# Altium PCB DEMO.PcbDoc
Units mil, origin at the board's own origin, x right, y up, seen from the top; angles counter-clockwise.
Board outline 945 x 855 mil, 2 copper layers (Top Layer, Bottom Layer); 81 components, 42 nets, 162 pads, 40 vias.
Unrouted connection lines stored in the file: 78.
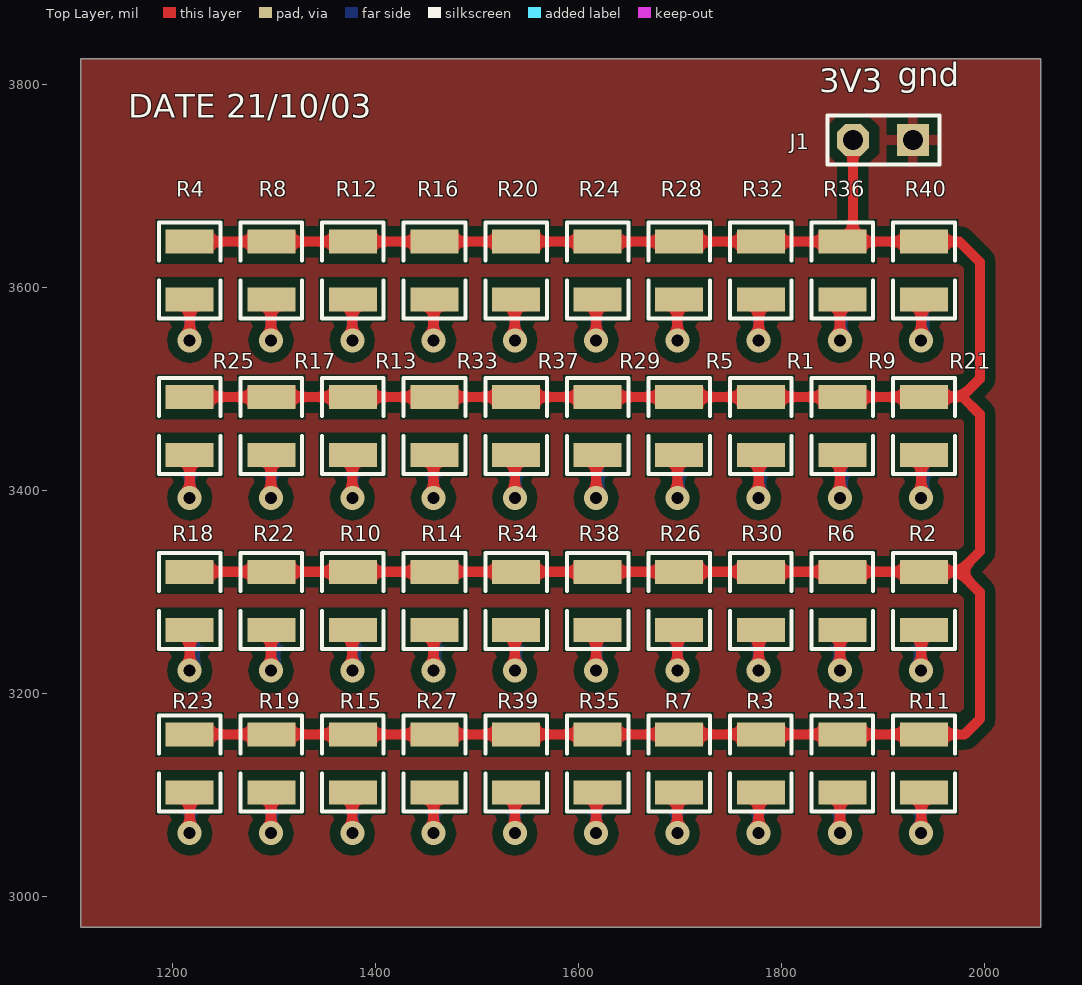
[diagram p0: Top Layer view]
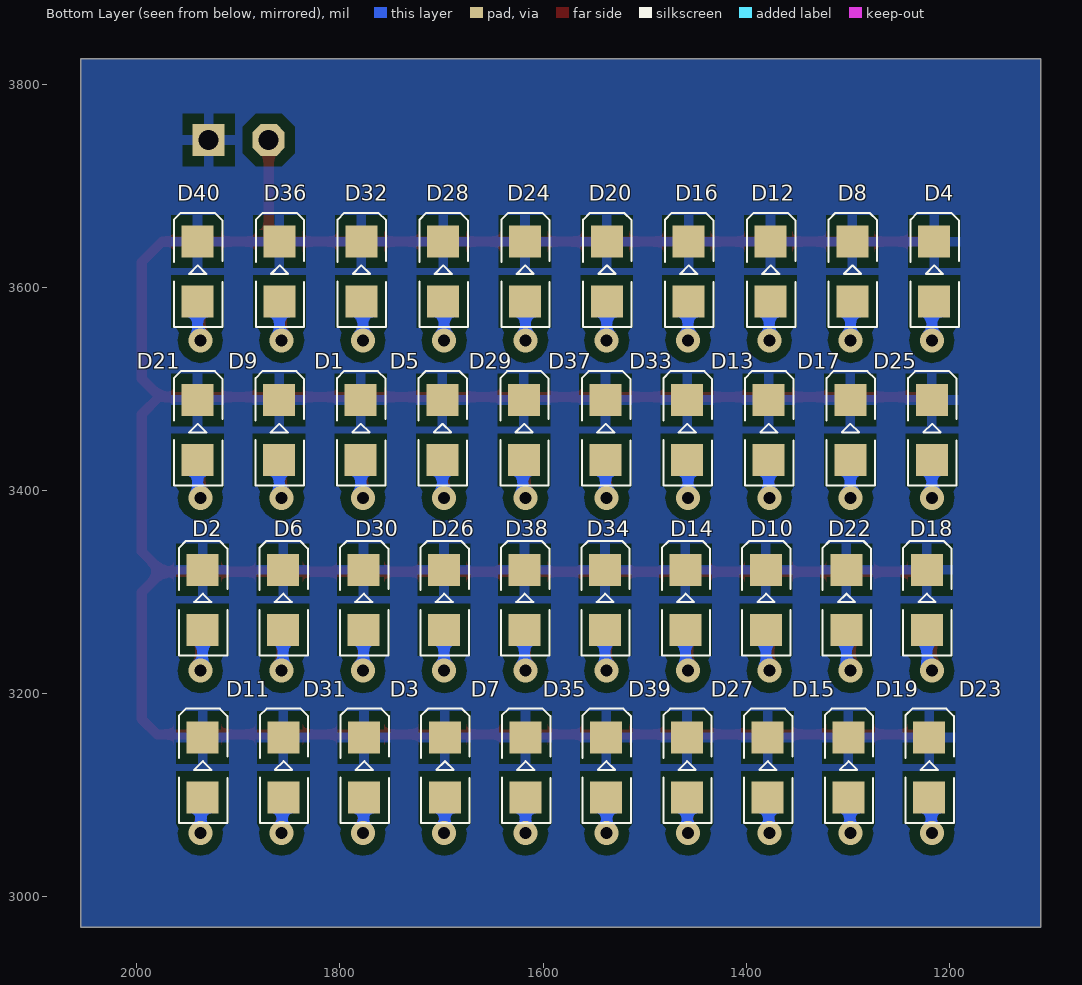
[diagram p1: Bottom Layer view, seen from below]

## Layer stack, top to bottom
Top Solder: solder mask 0.4, Solder Resist, Dk 3.5
Top Layer: signal copper 1.4
Dielectric 1: dielectric 12.6, FR-4, Dk 4.8
Bottom Layer: signal copper 1.4
Bottom Solder: solder mask 0.4, Solder Resist, Dk 3.5

## Board outline
1110,2970 2055,2970 2055,3825 1110,3825

## Design rules (kind name [scope] priority, off if disabled: settings)
Clearance [All] p1: gap=10 ignorepadtopadclearanceinfootprint=FALSE except(0: Arc-Hole Track-Hole SMDPad-Hole THPad-Hole Via-Hole Fill-Hole Poly-Hole Region-Hole Text-Hole)
PolygonConnect [All] p1: connectstyle=Relief reliefconductorwidth=10 reliefentries=4 polygonreliefangle="90 Angle" airgapwidth=10
RoutingVias [All] p1: holewidth=28 width=50 viastyle="Through Hole" minholewidth=28 minwidth=50 maxholewidth=28 maxwidth=50
SolderMaskExpansion [All] p1: expansion=4
Width [All] p1: maxlimit=10 minlimit=10 preferedwidth=10
30 further rules are at their usual default settings.

## Components (designator, comment, footprint, x,y, rotation, side; value= is the part's Value field where it differs from the comment)
D1 "LED_红灯" LED_0603 1779.4,3489.06 r270 bottom
D2 "LED_红灯" LED_0603 1935,3321.97 r270 bottom
D3 "LED_红灯" LED_0603 1776.11,3156.97 r270 bottom
D4 "LED_红灯" LED_0603 1215,3645 r270 bottom
D5 "LED_红灯" LED_0603 1699.09,3489.06 r270 bottom
D6 "LED_红灯" LED_0603 1855.81,3321.97 r270 bottom
D7 "LED_红灯" LED_0603 1696.67,3156.97 r270 bottom
D8 "LED_红灯" LED_0603 1295.56,3645 r270 bottom
D9 "LED_红灯" LED_0603 1859.7,3489.06 r270 bottom
D10 "LED_红灯" LED_0603 1380.66,3321.97 r270 bottom
D11 "LED_红灯" LED_0603 1935,3156.97 r270 bottom
D12 "LED_红灯" LED_0603 1376.11,3645 r270 bottom
D13 "LED_红灯" LED_0603 1377.89,3489.06 r270 bottom
D14 "LED_红灯" LED_0603 1459.86,3321.97 r270 bottom
D15 "LED_红灯" LED_0603 1378.89,3156.97 r270 bottom
D16 "LED_红灯" LED_0603 1456.67,3645 r270 bottom
D17 "LED_红灯" LED_0603 1297.59,3489.06 r270 bottom
D18 "LED_红灯" LED_0603 1222.28,3321.97 r270 bottom
D19 "LED_红灯" LED_0603 1299.44,3156.97 r270 bottom
D20 "LED_红灯" LED_0603 1537.22,3645 r270 bottom
D21 "LED_红灯" LED_0603 1940,3489.06 r270 bottom
D22 "LED_红灯" LED_0603 1301.47,3321.97 r270 bottom
D23 "LED_红灯" LED_0603 1220,3156.97 r270 bottom
D24 "LED_红灯" LED_0603 1617.78,3645 r270 bottom
D25 "LED_红灯" LED_0603 1217.28,3489.06 r270 bottom
D26 "LED_红灯" LED_0603 1697.43,3321.97 r270 bottom
D27 "LED_红灯" LED_0603 1458.33,3156.97 r270 bottom
D28 "LED_红灯" LED_0603 1698.33,3645 r270 bottom
D29 "LED_红灯" LED_0603 1618.79,3489.06 r270 bottom
D30 "LED_红灯" LED_0603 1776.62,3321.97 r270 bottom
D31 "LED_红灯" LED_0603 1855.56,3156.97 r270 bottom
D32 "LED_红灯" LED_0603 1778.89,3645 r270 bottom
D33 "LED_红灯" LED_0603 1458.19,3489.06 r270 bottom
D34 "LED_红灯" LED_0603 1539.05,3321.97 r270 bottom
D35 "LED_红灯" LED_0603 1617.22,3156.97 r270 bottom
D36 "LED_红灯" LED_0603 1859.44,3645 r270 bottom
D37 "LED_红灯" LED_0603 1538.49,3489.06 r270 bottom
D38 "LED_红灯" LED_0603 1618.24,3321.97 r270 bottom
D39 "LED_红灯" LED_0603 1537.78,3156.97 r270 bottom
D40 "LED_红灯" LED_0603 1940,3645 r270 bottom
J1 "CON" CON 1870,3745 r0 top
R1 "4.7K/10%" RES_0603 1779.4,3435 r90 top
R2 "4.7K/10%" RES_0603 1940,3262.91 r90 top
R3 "4.7K/10%" RES_0603 1779.4,3102.91 r90 top
R4 "4.7K/10%" RES_0603 1217.28,3587.91 r90 top
R5 "4.7K/10%" RES_0603 1699.09,3435 r90 top
R6 "4.7K/10%" RES_0603 1859.7,3262.91 r90 top
R7 "4.7K/10%" RES_0603 1699.09,3102.91 r90 top
R8 "4.7K/10%" RES_0603 1297.59,3587.91 r90 top
R9 "4.7K/10%" RES_0603 1859.7,3435 r90 top
R10 "4.7K/10%" RES_0603 1377.89,3262.91 r90 top
R11 "4.7K/10%" RES_0603 1940,3102.91 r90 top
R12 "4.7K/10%" RES_0603 1377.89,3587.91 r90 top
R13 "4.7K/10%" RES_0603 1377.89,3435 r90 top
R14 "4.7K/10%" RES_0603 1458.19,3262.91 r90 top
R15 "4.7K/10%" RES_0603 1377.89,3102.91 r90 top
R16 "4.7K/10%" RES_0603 1458.19,3587.91 r90 top
R17 "4.7K/10%" RES_0603 1297.59,3435 r90 top
R18 "4.7K/10%" RES_0603 1217.28,3262.91 r90 top
R19 "4.7K/10%" RES_0603 1297.59,3102.91 r90 top
R20 "4.7K/10%" RES_0603 1538.49,3587.91 r90 top
R21 "4.7K/10%" RES_0603 1940,3435 r90 top
R22 "4.7K/10%" RES_0603 1297.59,3262.91 r90 top
R23 "4.7K/10%" RES_0603 1217.28,3102.91 r90 top
R24 "4.7K/10%" RES_0603 1618.79,3587.91 r90 top
R25 "4.7K/10%" RES_0603 1217.28,3435 r90 top
R26 "4.7K/10%" RES_0603 1699.09,3262.91 r90 top
R27 "4.7K/10%" RES_0603 1458.19,3102.91 r90 top
R28 "4.7K/10%" RES_0603 1699.09,3587.91 r90 top
R29 "4.7K/10%" RES_0603 1618.79,3435 r90 top
R30 "4.7K/10%" RES_0603 1779.4,3262.91 r90 top
R31 "4.7K/10%" RES_0603 1859.7,3102.91 r90 top
R32 "4.7K/10%" RES_0603 1779.4,3587.91 r90 top
R33 "4.7K/10%" RES_0603 1458.19,3435 r90 top
R34 "4.7K/10%" RES_0603 1538.49,3262.91 r90 top
R35 "4.7K/10%" RES_0603 1618.79,3102.91 r90 top
R36 "4.7K/10%" RES_0603 1859.7,3587.91 r90 top
R37 "4.7K/10%" RES_0603 1538.49,3435 r90 top
R38 "4.7K/10%" RES_0603 1618.79,3262.91 r90 top
R39 "4.7K/10%" RES_0603 1538.49,3102.91 r90 top
R40 "4.7K/10%" RES_0603 1940,3587.91 r90 top

## Footprints (in the part's own frame and the unit in brackets; to place one, negate y for a bottom-side part, rotate by r counter-clockwise, add the part's x,y. Pads: shape width x height; smd on the part's side, far side on the other; paste and mask are expansions set on the pad)
CON [mm]
  oct 0.8x0.8 hole 0.5: 1(0,0)
  rect 0.8x0.8 hole 0.5: 2(1.5,0)
  silkscreen extent -0.63,-0.61 2.17,0.61
LED_0603 [mm]
  rect 0.8x0.8 smd: 1(0,0) 2(1.5,0)
  silkscreen extent -0.72,-0.59 2.14,0.62
RES_0603 [mm]
  rect 0.6x1.2 smd: 1(0,0) 2(1.45,0)
  silkscreen extent -0.48,-0.77 1.93,0.77

## Part data
D1 D2 D3 D4 D5 D6 D7 D8 D9 D10 D11 D12 D13 D14 D15 D16 D17 D18 D19 D20 D21 D22 D23 D24 D25 D26 D27 D28 D29 D30 D31 D32 D33 D34 D35 D36 D37 D38 D39 D40: library part LED
R1 R2 R3 R4 R5 R6 R7 R8 R9 R10 R11 R12 R13 R14 R15 R16 R17 R18 R19 R20 R21 R22 R23 R24 R25 R26 R27 R28 R29 R30 R31 R32 R33 R34 R35 R36 R37 R38 R39 R40: library part RES

## Via types
v1: diameter 23.62, hole 11.81, Top Layer to Bottom Layer, 40 vias

## Nets (pads, with @x,y where several pads share a name; then routed paths per layer and width w, separated by ;. In a path a pad name is that pad's centre, name@x,y a point inside that pad or via, vN(x,y) a via of type N, cw(c..) or ccw(c..) an arc to the next point about the centre after c; other vN are vias at no path point)
3v3: J1.1 R1.2 R2.2 R3.2 R4.2 R5.2 R6.2 R7.2 R8.2 R9.2 R10.2 R11.2 R12.2 R13.2 R14.2 R15.2 R16.2 R17.2 R18.2 R19.2 R20.2 R21.2 R22.2 R23.2 R24.2 R25.2 R26.2 R27.2 R28.2 R29.2 R30.2 R31.2 R32.2 R33.2 R34.2 R35.2 R36.2 R37.2 R38.2 R39.2 R40.2 | length 3672.2
  Top Layer w10: R23.2 R19.2 R15.2 R27.2 R39.2 R35.2 R7.2 R3.2 R31.2 R11.2 1980,3160 1995,3175 1995,3300 1975,3320 ; R18.2 R22.2 R10.2 R14.2 R34.2 R38.2 R26.2 R30.2 R6.2 R2.2 1975,3320 ; R25.2 R17.2 R13.2 R33.2 R37.2 R29.2 R5.2 R1.2 R9.2 R21.2 1977.09,3492.09 ; R4.2 R8.2 R12.2 R16.2 R20.2 R24.2 R28.2 R32.2 R36.2 R36.2@1863.19,3645 ; J1.1 1870,3651.81 R36.2@1863.19,3645 ; R36.2@1863.19,3645 R40.2 1975,3645 1995,3625 1995,3510 1977.09,3492.09 ; 1975,3320 1995,3340 1995,3475 1977.91,3492.09 1977.09,3492.09
GND: D1.1 D2.1 D3.1 D4.1 D5.1 D6.1 D7.1 D8.1 D9.1 D10.1 D11.1 D12.1 D13.1 D14.1 D15.1 D16.1 D17.1 D18.1 D19.1 D20.1 D21.1 D22.1 D23.1 D24.1 D25.1 D26.1 D27.1 D28.1 D29.1 D30.1 D31.1 D32.1 D33.1 D34.1 D35.1 D36.1 D37.1 D38.1 D39.1 D40.1 J1.2
NetD1_2: D1.2 R1.1 | length 78.4
  Top Layer w10: v1(1777.28,3392.72) R1.1@1777.28,3432.91
  Bottom Layer w10: v1(1777.28,3392.72) 1779.4,3394.83 D1.2
NetD2_2: D2.2 R2.1 | length 81.3
  Top Layer w10: v1(1937.28,3222.72) R2.1@1937.28,3262.91
  Bottom Layer w10: D2.2 1935,3225 v1(1937.28,3222.72)
NetD3_2: D3.2 R3.1 | length 75.9
  Top Layer w10: v1(1777.28,3062.72) R3.1@1777.28,3102.91
  Bottom Layer w10: D3.2 1776.61,3097.42 1776.61,3063.39 v1(1777.28,3062.72)
NetD4_2: D4.2 R4.1 | length 79.4
  Top Layer w10: v1(1217.28,3547.72) R4.1
  Bottom Layer w10: D4.2 1217.28,3583.66 v1(1217.28,3547.72)
NetD5_2: D5.2 R5.1 | length 78.2
  Top Layer w10: v1(1697.28,3392.72) R5.1@1697.28,3432.91
  Bottom Layer w10: v1(1697.28,3392.72) 1699.09,3394.53 D5.2
NetD6_2: D6.2 R6.1 | length 81
  Top Layer w10: v1(1857.28,3222.72) R6.1@1857.28,3262.91
  Bottom Layer w10: D6.2 1855.81,3224.19 v1(1857.28,3222.72)
NetD7_2: D7.2 R7.1 | length 75.6
  Top Layer w10: v1(1697.28,3062.72) R7.1@1697.28,3102.91
  Bottom Layer w10: D7.2 1696.67,3063.33 v1(1697.28,3062.72)
NetD8_2: D8.2 R8.1 | length 79.1
  Top Layer w10: v1(1297.28,3547.72) R8.1@1297.28,3587.91
  Bottom Layer w10: D8.2 1297.28,3584.22 v1(1297.28,3547.72)
NetD9_2: D9.2 R9.1 | length 78.5
  Top Layer w10: v1(1857.28,3392.72) R9.1@1857.28,3432.91
  Bottom Layer w10: v1(1857.28,3392.72) 1859.7,3395.13 D9.2
NetD10_2: D10.2 R10.1 | length 81.8
  Top Layer w10: v1(1377.28,3222.72) R10.1@1377.28,3262.91
  Bottom Layer w10: v1(1377.28,3222.72) 1377.28,3226.4 1380.66,3229.78 D10.2
NetD11_2: D11.2 R11.1 | length 76.3
  Top Layer w10: v1(1937.28,3062.72) R11.1@1937.28,3102.91
  Bottom Layer w10: D11.2 1936.61,3096.3 1936.61,3063.39 v1(1937.28,3062.72)
NetD12_2: D12.2 R12.1 | length 78.9
  Top Layer w10: v1(1377.28,3547.72) R12.1@1377.28,3587.91
  Bottom Layer w10: D12.2 1377.28,3584.77 v1(1377.28,3547.72)
NetD13_2: D13.2 R13.1 | length 77.7
  Top Layer w10: v1(1377.28,3392.72) R13.1@1377.28,3432.91
  Bottom Layer w10: v1(1377.28,3392.72) 1377.89,3393.32 D13.2
NetD14_2: D14.2 R14.1 | length 81.5
  Top Layer w10: v1(1457.28,3222.72) R14.1@1457.28,3262.91
  Bottom Layer w10: v1(1457.28,3222.72) 1459.86,3225.29 D14.2
NetD15_2: D15.2 R15.1 | length 76.1
  Top Layer w10: v1(1377.28,3062.72) R15.1@1377.28,3102.91
  Bottom Layer w10: v1(1377.28,3062.72) 1377.96,3063.39 1377.96,3096.98 D15.2
NetD16_2: D16.2 R16.1 | length 78.7
  Top Layer w10: v1(1457.28,3547.72) R16.1@1457.28,3587.91
  Bottom Layer w10: D16.2 1457.28,3585.33 v1(1457.28,3547.72)
NetD17_2: D17.2 R17.1 | length 77.6
  Top Layer w10: v1(1297.28,3392.72) R17.1@1297.28,3432.91
  Bottom Layer w10: v1(1297.28,3392.72) 1297.59,3393.02 D17.2
NetD18_2: D18.2 R18.1 | length 82.5
  Top Layer w10: v1(1217.28,3222.72) R18.1
  Bottom Layer w10: v1(1217.28,3222.72) 1217.28,3226.4 1222.28,3231.4 D18.2
NetD19_2: D19.2 R19.1 | length 76.3
  Top Layer w10: v1(1297.28,3062.72) R19.1@1297.28,3102.91
  Bottom Layer w10: v1(1297.28,3062.72) 1297.96,3063.39 1297.96,3096.43 D19.2
NetD20_2: D20.2 R20.1 | length 78.5
  Top Layer w10: v1(1537.28,3547.72) R20.1@1537.28,3587.91
  Bottom Layer w10: D20.2 1537.28,3585.88 v1(1537.28,3547.72)
NetD21_2: D21.2 R21.1 | length 78.6
  Top Layer w10: v1(1937.28,3392.72) R21.1@1937.28,3432.91
  Bottom Layer w10: v1(1937.28,3392.72) 1937.28,3396.4 1940,3399.12 D21.2
NetD22_2: D22.2 R22.1 | length 82.1
  Top Layer w10: v1(1297.28,3222.72) R22.1@1297.28,3262.91
  Bottom Layer w10: v1(1297.28,3222.72) 1297.28,3226.4 1301.47,3230.59 D22.2
NetD23_2: D23.2 R23.1 | length 76.5
  Top Layer w10: v1(1217.28,3062.72) R23.1
  Bottom Layer w10: v1(1217.28,3062.72) 1217.96,3063.39 1217.96,3095.87 D23.2
NetD24_2: D24.2 R24.1 | length 78.6
  Top Layer w10: v1(1617.28,3547.72) R24.1@1617.28,3587.91
  Bottom Layer w10: v1(1617.28,3547.72) 1617.28,3585.45 D24.2
NetD25_2: D25.2 R25.1 | length 77.5
  Top Layer w10: v1(1217.28,3392.72) R25.1@1217.28,3432.91
  Bottom Layer w10: v1(1217.28,3392.72) D25.2
NetD26_2: D26.2 R26.1 | length 80.5
  Top Layer w10: v1(1697.28,3222.72) R26.1@1697.28,3262.91
  Bottom Layer w10: v1(1697.28,3222.72) 1697.43,3222.86 D26.2
NetD27_2: D27.2 R27.1 | length 75.8
  Top Layer w10: v1(1457.28,3062.72) R27.1@1457.28,3102.91
  Bottom Layer w10: v1(1457.28,3062.72) 1457.96,3063.39 1457.96,3097.54 D27.2
NetD28_2: D28.2 R28.1 | length 78.9
  Top Layer w10: v1(1697.28,3547.72) R28.1@1697.28,3587.91
  Bottom Layer w10: v1(1697.28,3547.72) 1697.28,3584.9 D28.2
NetD29_2: D29.2 R29.1 | length 78.6
  Top Layer w10: v1(1617.28,3392.72) R29.1@1617.28,3432.91
  Bottom Layer w10: v1(1617.28,3392.72) 1617.28,3396.4 1620,3399.12 D29.2@1620,3430
NetD30_2: D30.2 R30.1 | length 80.7
  Top Layer w10: v1(1777.28,3222.72) R30.1@1777.28,3262.91
  Bottom Layer w10: D30.2 1776.62,3223.38 v1(1777.28,3222.72)
NetD31_2: D31.2 R31.1 | length 76.1
  Top Layer w10: v1(1857.28,3062.72) R31.1@1857.28,3102.91
  Bottom Layer w10: D31.2 1856.61,3096.86 1856.61,3063.39 v1(1857.28,3062.72)
NetD32_2: D32.2 R32.1 | length 79.1
  Top Layer w10: v1(1777.28,3547.72) R32.1@1777.28,3587.91
  Bottom Layer w10: v1(1777.28,3547.72) 1777.28,3584.34 D32.2
NetD33_2: D33.2 R33.1 | length 77.9
  Top Layer w10: v1(1457.28,3392.72) R33.1@1457.28,3432.91
  Bottom Layer w10: v1(1457.28,3392.72) 1457.28,3429.09 D33.2
NetD34_2: D34.2 R34.1 | length 81.1
  Top Layer w10: v1(1537.28,3222.72) R34.1@1537.28,3262.91
  Bottom Layer w10: v1(1537.28,3222.72) 1539.05,3224.48 D34.2
NetD35_2: D35.2 R35.1 | length 75.4
  Top Layer w10: v1(1617.28,3062.72) R35.1@1617.28,3102.91
  Bottom Layer w10: D35.2 1617.22,3062.78 v1(1617.28,3062.72)
NetD36_2: D36.2 R36.1 | length 79.3
  Top Layer w10: v1(1857.28,3547.72) R36.1@1857.28,3587.91
  Bottom Layer w10: v1(1857.28,3547.72) 1859.44,3549.88 D36.2
NetD37_2: D37.2 R37.1 | length 78
  Top Layer w10: v1(1537.28,3392.72) R37.1@1537.28,3432.91
  Bottom Layer w10: v1(1537.28,3392.72) 1538.49,3393.92 D37.2
NetD38_2: D38.2 R38.1 | length 80.8
  Top Layer w10: v1(1617.28,3222.72) R38.1@1617.28,3262.91
  Bottom Layer w10: v1(1617.28,3222.72) 1618.24,3223.67 D38.2
NetD39_2: D39.2 R39.1 | length 75.6
  Top Layer w10: v1(1537.28,3062.72) R39.1@1537.28,3102.91
  Bottom Layer w10: v1(1537.28,3062.72) 1537.28,3097.28 1537.78,3097.78 D39.2
NetD40_2: D40.2 R40.1 | length 79.6
  Top Layer w10: v1(1937.28,3547.72) R40.1@1937.28,3587.91
  Bottom Layer w10: v1(1937.28,3547.72) 1937.28,3551.4 1940,3554.12 D40.2

## Polygon pours and split planes (outlines as drawn)
GND on Top Layer "Top Layer-No Net" (solid, remove dead copper, pour order 0): 1110,3825 1110,2970 2055,2970 2055,3825
GND on Bottom Layer "Top Layer-No Net" (solid, remove dead copper, pour order 2): 1110,3825 1110,2970 2055,2970 2055,3825

## Silkscreen, mask and mechanical layers (free items; w line width, h text height)
Top Overlay:
  text "gnd" at 1914,3790 h40
  text "3V3" at 1837,3784 h40
  text "DATE 21/10/03" at 1157,3759 h40
Mechanical 1:
  the board outline again, w30